# Altium PCB MT6305B_TestCircuit.PcbDoc
Units mm, origin at the board's own origin, x right, y up, seen from the top; angles counter-clockwise.
Board outline 26.04 x 55.24 mm, 2 copper layers (Top Layer, Bottom Layer); 22 components, 19 nets, 93 pads, 29 vias.
Unrouted connection lines stored in the file: 34.
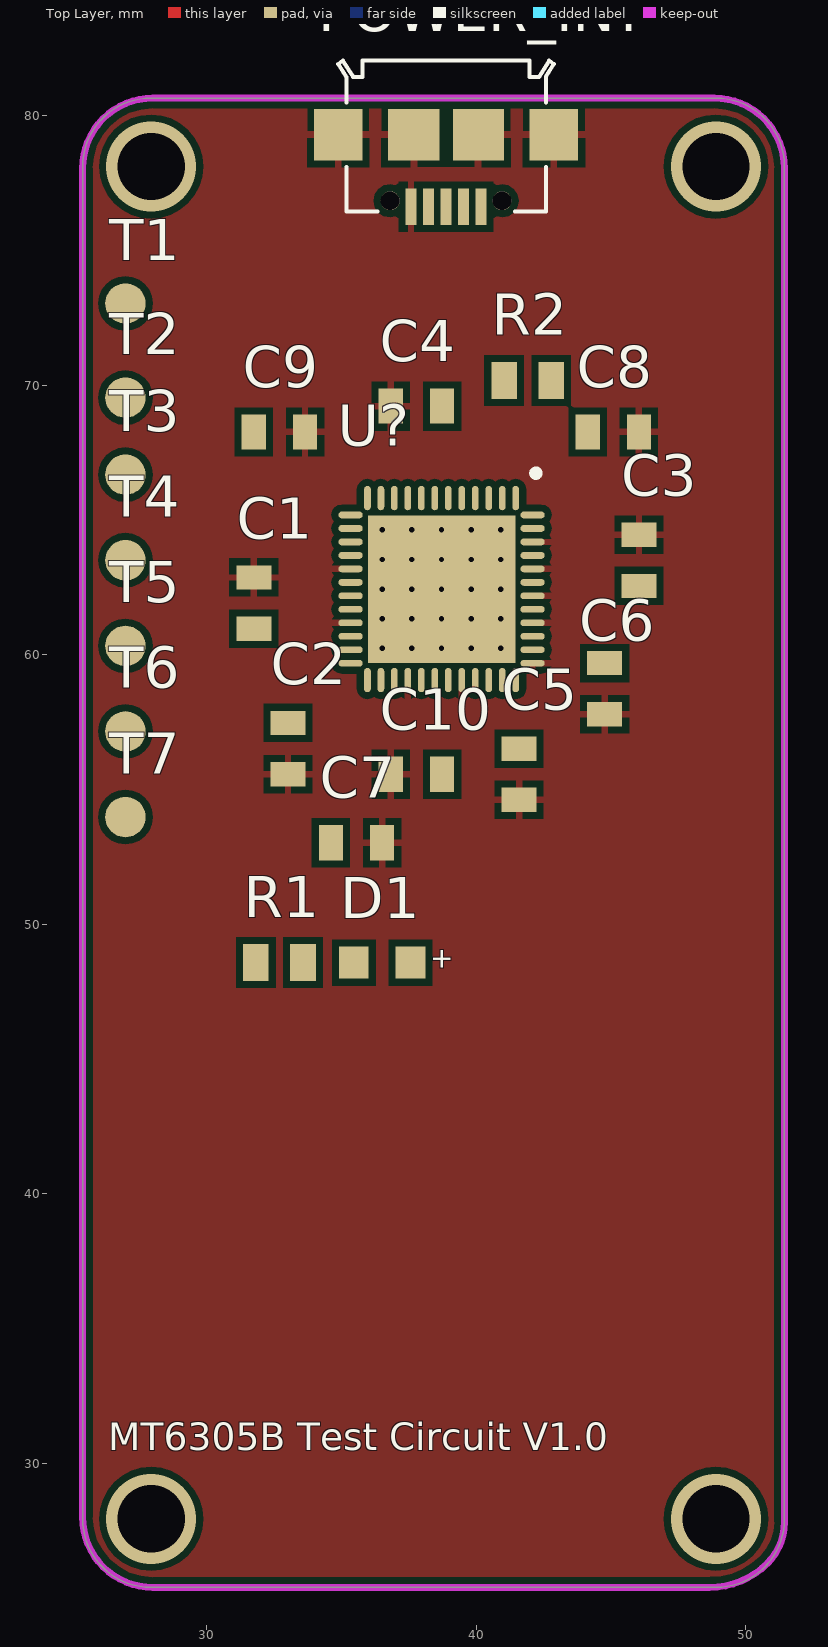
[diagram p0: Top Layer view]
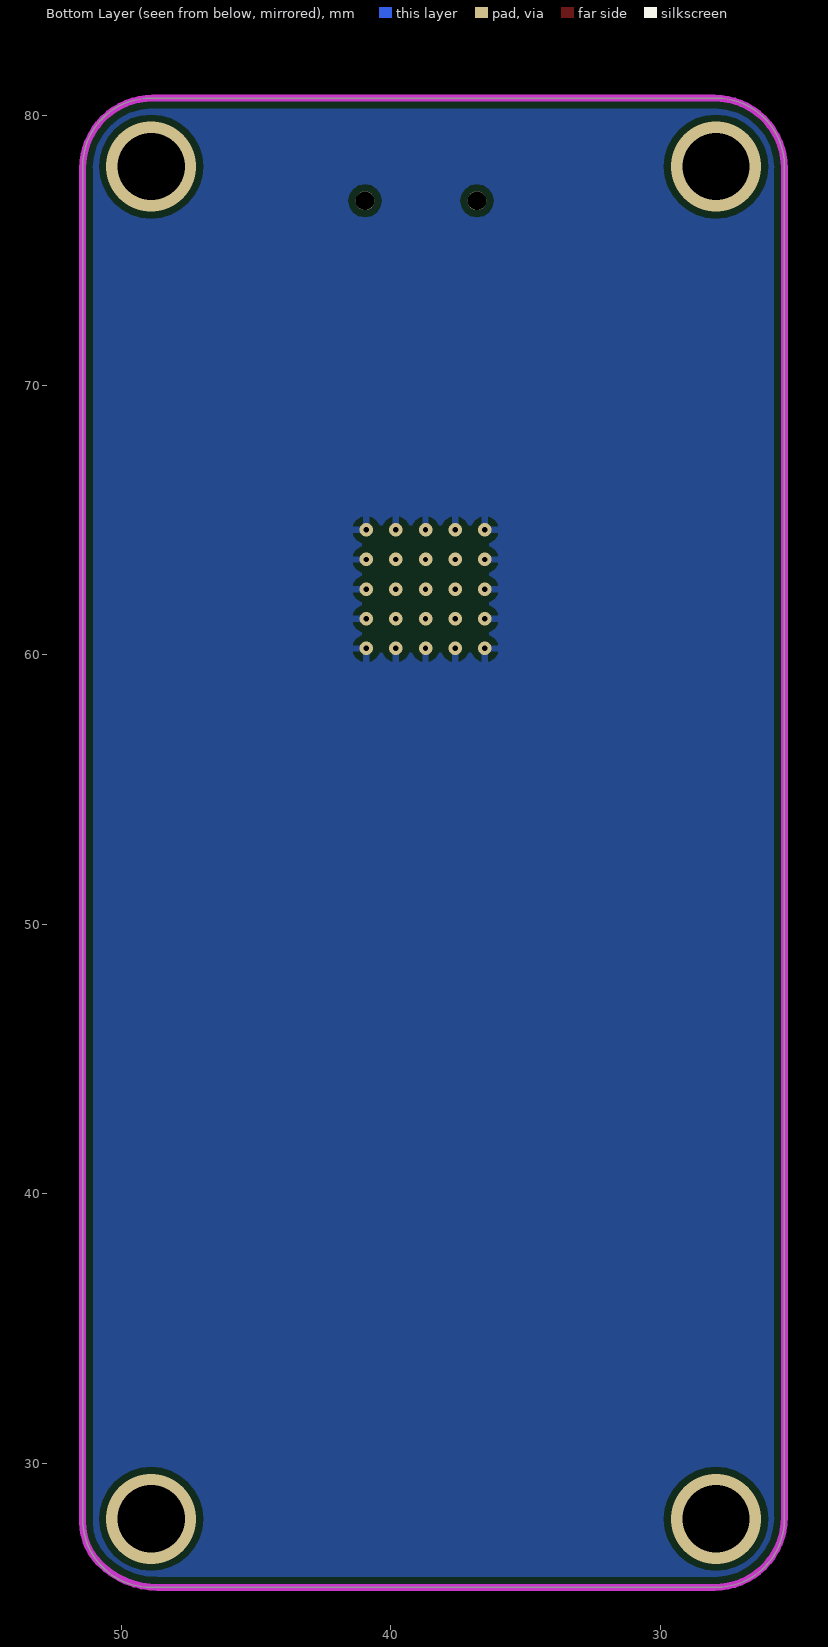
[diagram p1: Bottom Layer view, seen from below]

## Layer stack, top to bottom
Top Solder: solder mask 0.0102, Solder Resist, Dk 3.5
Top Layer: signal copper 0.0356
Dielectric 1: dielectric 0.32, FR-4, Dk 4.8
Bottom Layer: signal copper 0.0356
Bottom Solder: solder mask 0.0102, Solder Resist, Dk 3.5

## Board outline
25.4,78.105 cw(c27.94,78.105) 27.94,80.645 48.895,80.645 cw(c48.895,78.105) 51.435,78.105 51.435,27.94 cw(c48.895,27.94) 48.895,25.4 27.94,25.4 cw(c27.94,27.94) 25.4,27.94

## Design rules (kind name [scope] priority, off if disabled: settings)
Clearance [All] p1: gap=0.254 ignorepadtopadclearanceinfootprint=FALSE except(0: Arc-Hole Track-Hole SMDPad-Hole THPad-Hole Via-Hole Fill-Hole Poly-Hole Region-Hole Text-Hole)
PolygonConnect [All] p1: connectstyle=Relief reliefconductorwidth=0.254 reliefentries=4 polygonreliefangle="90 Angle" airgapwidth=0.254
RoutingVias [All] p1: holewidth=0.711 width=1.27 viastyle="Through Hole" minholewidth=0.711 minwidth=1.27 maxholewidth=0.711 maxwidth=1.27
SolderMaskExpansion [All] p1: expansion=0.102 istentingtop=FALSE
Width [All] p1: maxlimit=0.254 minlimit=0.254 preferedwidth=0.254
30 further rules are at their usual default settings.

## Components (designator, comment, footprint, x,y, rotation, side; value= is the part's Value field where it differs from the comment)
C1 "100nF" WCAP-CSGP_0805_H=0.8mm_Reflow 31.75,61.912 r90 top
C2 "2.2µF" WCAP-CSGP_0805_H=0.8mm_Reflow 33.02,56.515 r270 top
C3 "4.7µF" WCAP-CSGP_0805_H=0.8mm_Reflow 46.038,63.5 r90 top
C4 "2.2µF" WCAP-CSGP_0805_H=0.8mm_Reflow 37.782,69.215 r180 top
C5 "100nF" WCAP-CSGP_0805_H=0.8mm_Reflow 41.593,55.562 r270 top
C6 "2.2µF" WCAP-CSGP_0805_H=0.8mm_Reflow 44.767,58.737 r270 top
C7 "220nF" WCAP-CSGP_0805_H=0.8mm_Reflow 35.56,53.023 r0 top
C8 "2.2µF" WCAP-CSGP_0805_H=0.8mm_Reflow 45.085,68.263 r0 top
C9 "2.2µF" WCAP-CSGP_0805_H=0.8mm_Reflow 32.703,68.263 r0 top
C10 "100nF" WCAP-CSGP_0805_H=0.8mm_Reflow 37.782,55.562 r180 top
D1 "" WL-SMCW_0805 36.512,48.578 r0 top
POWER_IN? "Micro USB 2.0 Type B Receptacle" 629105136821 38.883,79.285 r180 top
R1 "120Ω" WRIS-PSMB_0805_H=0.22mm 32.703,48.578 r0 top
R2 "0.2Ω" WRIS-PSMB_0805_H=0.22mm 41.91,70.168 r180 top
T1 "" Testpoint 26.987,73.025 r0 top
T2 "" Testpoint 26.987,69.532 r0 top
T3 "" Testpoint 26.987,66.675 r0 top
T4 "" Testpoint 26.987,63.5 r0 top
T5 "" Testpoint 26.987,60.325 r0 top
T6 "" Testpoint 26.987,57.15 r0 top
T7 "" Testpoint 26.987,53.975 r0 top
U? "MT6305B" MT6305 38.715,62.43 r270 top

## Footprints (in the part's own frame and the unit in brackets; to place one, negate y for a bottom-side part, rotate by r counter-clockwise, add the part's x,y. Pads: shape width x height; smd on the part's side, far side on the other; paste and mask are expansions set on the pad)
629105136821 [mm] "Micro USB 2.0 SMT Type B Horizontal 5 Contacts"
  rect 0.4x1.35 smd: 1(-1.3,2.675) 2(-0.65,2.675) 3(0,2.675) 4(0.65,2.675) 5(1.3,2.675)
  round 0.7 hole 0.7 unplated: MH1(-2.075,2.45) MH2(2.075,2.45)
  rect 1.8x1.9 smd: S1(-4,0) S4(4,0)
  rect 1.9x1.9 smd: S2(-1.2,0) S3(1.2,0)
  silkscreen extent -4,-2.75 4,2.85, body extent -4,-2.73 4,3.17, height 2.69
MT6305 [mm] "QFN, 48-Leads, Body 7,00x7,00mm, Pitch 0,50mm, Thermal Pad 5,47x5,47mm, IPC Medium Density"
  oval 0.9x0.25 smd: 1(-3.375,2.75) 2(-3.375,2.25) 3(-3.375,1.75) 4(-3.375,1.25) 5(-3.375,0.75) 6(-3.375,0.25) 7(-3.375,-0.25) 8(-3.375,-0.75) 9(-3.375,-1.25) 10(-3.375,-1.75) 11(-3.375,-2.25) 12(-3.375,-2.75) 25(3.375,-2.75) 26(3.375,-2.25) 27(3.375,-1.75) 28(3.375,-1.25) 29(3.375,-0.75) 30(3.375,-0.25) 31(3.375,0.25) 32(3.375,0.75) 33(3.375,1.25) 34(3.375,1.75) 35(3.375,2.25) 36(3.375,2.75)
  oval 0.25x0.9 smd: 13(-2.75,-3.375) 14(-2.25,-3.375) 15(-1.75,-3.375) 16(-1.25,-3.375) 17(-0.75,-3.375) 18(-0.25,-3.375) 19(0.25,-3.375) 20(0.75,-3.375) 21(1.25,-3.375) 22(1.75,-3.375) 23(2.25,-3.375) 24(2.75,-3.375) 37(2.75,3.375) 38(2.25,3.375) 39(1.75,3.375) 40(1.25,3.375) 41(0.75,3.375) 42(0.25,3.375) 43(-0.25,3.375) 44(-0.75,3.375) 45(-1.25,3.375) 46(-1.75,3.375) 47(-2.25,3.375) 48(-2.75,3.375)
  rect 5.47x5.47 smd: 49(0,0)
  silkscreen extent -4.42,3.38 -4.18,3.63, body extent -3.52,-3.52 3.52,3.52, height 0.9
Testpoint [mm]
  round 1.5 / inner round 1.5 / far side round 0 all layers, no hole: 1(0,0)
WCAP-CSGP_0805_H=0.8mm_Reflow [mm] "Ceramic Capacitors, body 2x1.25mm"
  rect 0.9x1.3 smd: 1(-0.95,0) 2(0.95,0)
  body extent -1,-0.62 1,0.63, height 0.8
WL-SMCW_0805 [mm] "SMD Mono-color Chip LED, body 2.0x1.25mm"
  rect 1.1x1.2 smd: 1(-1.05,0) 2(1.05,0)
  body extent -1,-0.63 1,0.62, height 0.7
WRIS-PSMB_0805_H=0.22mm [mm] "Metal Plate Resistor, SMT, body size 2x1.25mm"
  rect 0.95x1.36 smd: 1(-0.875,0) 2(0.875,0)
  body extent -1,-0.62 1,0.63, height 0.22

## Part data
C1 C2 C3 C4 C5 C6 C7 C8 C9 C10: library part Cap, "Capacitor", LatestRevisionDate=17-Jul-2002, LatestRevisionNote="Re-released for DXP Platform.", PackageDescription="Radial Cap, Thru-Hole; 2 Leads; 0.3 in Pin Spacing", PackageReference=RAD-0.3, Published=8-Jun-2000, Publisher="Altium Limited"
D1: library part 150080BS75000, "SMT Mono-color Chip LED Waterclear WL-SMCW, size 0805, Blue, 3.2 V, 140 deg, 145 mcd", Emitting Color=Blue, Forward Voltage="3.2 V", Operating Temperature="-40 to 85 degC", Chip Technology=InGaN, ComponentLink1Description=Manufacturer, ComponentLink1URL=http://www.we-online.de, ComponentLink2Description=Datasheet, ComponentLink2URL=https://katalog.we-online.de/led/datasheet/150080BS75000.pdf, Dominant Wavelength="470 nm", Luminous Intensity="145 mcd", Mounting Technology=SMT, Packaging="Tape and Reel", Part Number=150080BS75000, Peak Wavelength="465 nm", Published Date="November 2018", Publisher="Wurth Elektronik", Size=0805, Viewing Angle="140 deg"
POWER_IN?: library part 629105136821, "Micro USB 2.0 Type B, Receptacle, Horizontal, SMT", Operating Temperature="-40 to +105degC", Rated Current=1A, Working Voltage=30VAC, Application="Micro USB 2.0", ComponentLink1Description=Manufacturer, ComponentLink1URL=http://www.we-online.de, ComponentLink2Description=Datasheet, ComponentLink2URL=https://katalog.we-online.com/em/datasheet/629105136821.pdf, Gender=Receptacle, Interface Type="Type B", Mounting Technology=SMT, Packaging="Tape and Reel", Part Number=629105136821, Pin Number=5, Published Date="September 2019", Publisher="Wurth Elektronik", Type=Horizontal
R1 R2: library part Res2, "Resistor", LatestRevisionDate=17-Jul-2002, LatestRevisionNote="Re-released for DXP Platform.", PackageDescription="Axial Device, Thru-Hole; 2 Leads; 0.4 in Pin Spacing", PackageReference=AXIAL-0.4, Published=8-Jun-2000, Publisher="Altium Limited"
T1 T2 T3 T4 T5 T6 T7: library part Testpoint

## Via types
v1: diameter 0.5, hole 0.2, Top Layer to Bottom Layer, 25 vias
v2: diameter 3.333, hole 2.5, Top Layer to Bottom Layer, 4 vias

## Nets (pads, with @x,y where several pads share a name; then routed paths per layer and width w, separated by ;. In a path a pad name is that pad's centre, name@x,y a point inside that pad or via, vN(x,y) a via of type N, cw(c..) or ccw(c..) an arc to the next point about the centre after c; other vN are vias at no path point)
#SYS_RESET: U?.24
+5V: C10.1 POWER_IN?.1 R1.1 R2.1 T1.1 U?.1 U?.7 U?.19 U?.26 U?.47
BBWAKEUP: U?.33
GND: C1.2 C2.2 C3.2 C4.2 C5.2 C6.2 C7.2 C8.2 C9.2 C10.2 POWER_IN?.5 POWER_IN?.S1 POWER_IN?.S2 POWER_IN?.S3 POWER_IN?.S4 U?.17 U?.21 U?.28 U?.32 U?.37 U?.40 U?.42 U?.44 U?.46 U?.49
  other v1: 36.515,60.23 37.615,60.23 38.715,60.23 39.815,60.23 40.915,60.23 36.515,61.33 37.615,61.33 38.715,61.33 39.815,61.33 40.915,61.33 36.515,62.43 37.615,62.43 38.715,62.43 39.815,62.43 40.915,62.43 36.515,63.53 37.615,63.53 38.715,63.53 39.815,63.53 40.915,63.53 36.515,64.63 37.615,64.63 38.715,64.63 39.815,64.63 40.915,64.63
NetC1_1: C1.1 U?.23
NetC5_1: C5.1 U?.29
NetD1_1: D1.1 U?.41
NetD1_2: D1.2 R1.2
NetR2_2: R2.2 U?.4
SRCLKENA: U?.31
USBD+: POWER_IN?.3
USBD-: POWER_IN?.2
VA: C3.1 T6.1 U?.27
VCORE: C6.1 T2.1 U?.48
VDD: C4.1 T3.1 U?.3 U?.12 U?.13 U?.20 U?.36 U?.43 U?.45
VM: C9.1 T4.1 U?.18
VRTC: C7.1 T5.1 U?.22
VSIM: C8.1 T7.1 U?.8
VTCXO: C2.1 U?.25
pads on no net: POWER_IN?.4 POWER_IN?.MH1 POWER_IN?.MH2 U?.2 U?.5 U?.6 U?.9 U?.10 U?.11 U?.14 U?.15 U?.16 U?.30 U?.34 U?.35 U?.38 U?.39
copper on no net:
  other v2: 27.94,27.94 48.895,27.94 27.94,78.105 48.895,78.105

## Polygon pours and split planes (outlines as drawn)
GND on Top Layer "GND_L01_P000" (solid, pour order 0): 25.4,78.105 cw(c27.94,78.105) 27.94,80.645 48.895,80.645 cw(c48.895,78.105) 51.435,78.105 51.435,27.94 cw(c48.895,27.94) 48.895,25.4 27.94,25.4 cw(c27.94,27.94) 25.4,27.94
GND on Bottom Layer "GND_L02_P001" (solid, pour order 1): 25.4,27.94 ccw(c27.94,27.94) 27.94,25.4 48.895,25.4 ccw(c48.895,27.94) 51.435,27.94 51.435,78.105 ccw(c48.895,78.105) 48.895,80.645 27.94,80.645 ccw(c27.94,78.105) 25.4,78.105

## Keep-outs
Keep-Out Layer:
  lines w0.254: 25.4,28.002 ccw(c28.002,28.002) 26.162,26.162 ccw(c28.002,28.002) 28.002,25.4 48.654,25.4 ccw(c48.654,28.435) 50.8,26.289 ccw(c49.267,27.822) 51.435,27.822 51.435,78.043 ccw(c48.833,78.043) 50.673,79.883 ccw(c48.833,78.043) 48.833,80.645 28.002,80.645 ccw(c28.002,78.043) 26.162,79.883 ccw(c28.002,78.043) 25.4,78.043 25.4,76.454 25.4,28.002

## Silkscreen, mask and mechanical layers (free items; w line width, h text height)
Top Overlay:
  text "MT6305B Test Circuit V1.0" at 26.352,30.48 h1.02
Bottom Overlay:
  text "What to test with this board: / -" at 54.483,53.975 h0.76

## Text inside footprints (layer, text, board x,y; h text height)
D1: Top Overlay "+" at 39.062,48.278 h0.76 r90
POWER_IN?: Mechanical 2 "PCB Edge" at 40.083,81.385 h0.41 r180